# Altium PCB ECARD.PcbDoc (part 1 of 2)
Units mm, origin at the board's own origin, x right, y up, seen from the top; angles counter-clockwise.
Board outline 85.5 x 54 mm, 2 copper layers (Top Layer, Bottom Layer); 58 components, 66 nets, 238 pads, 223 vias.
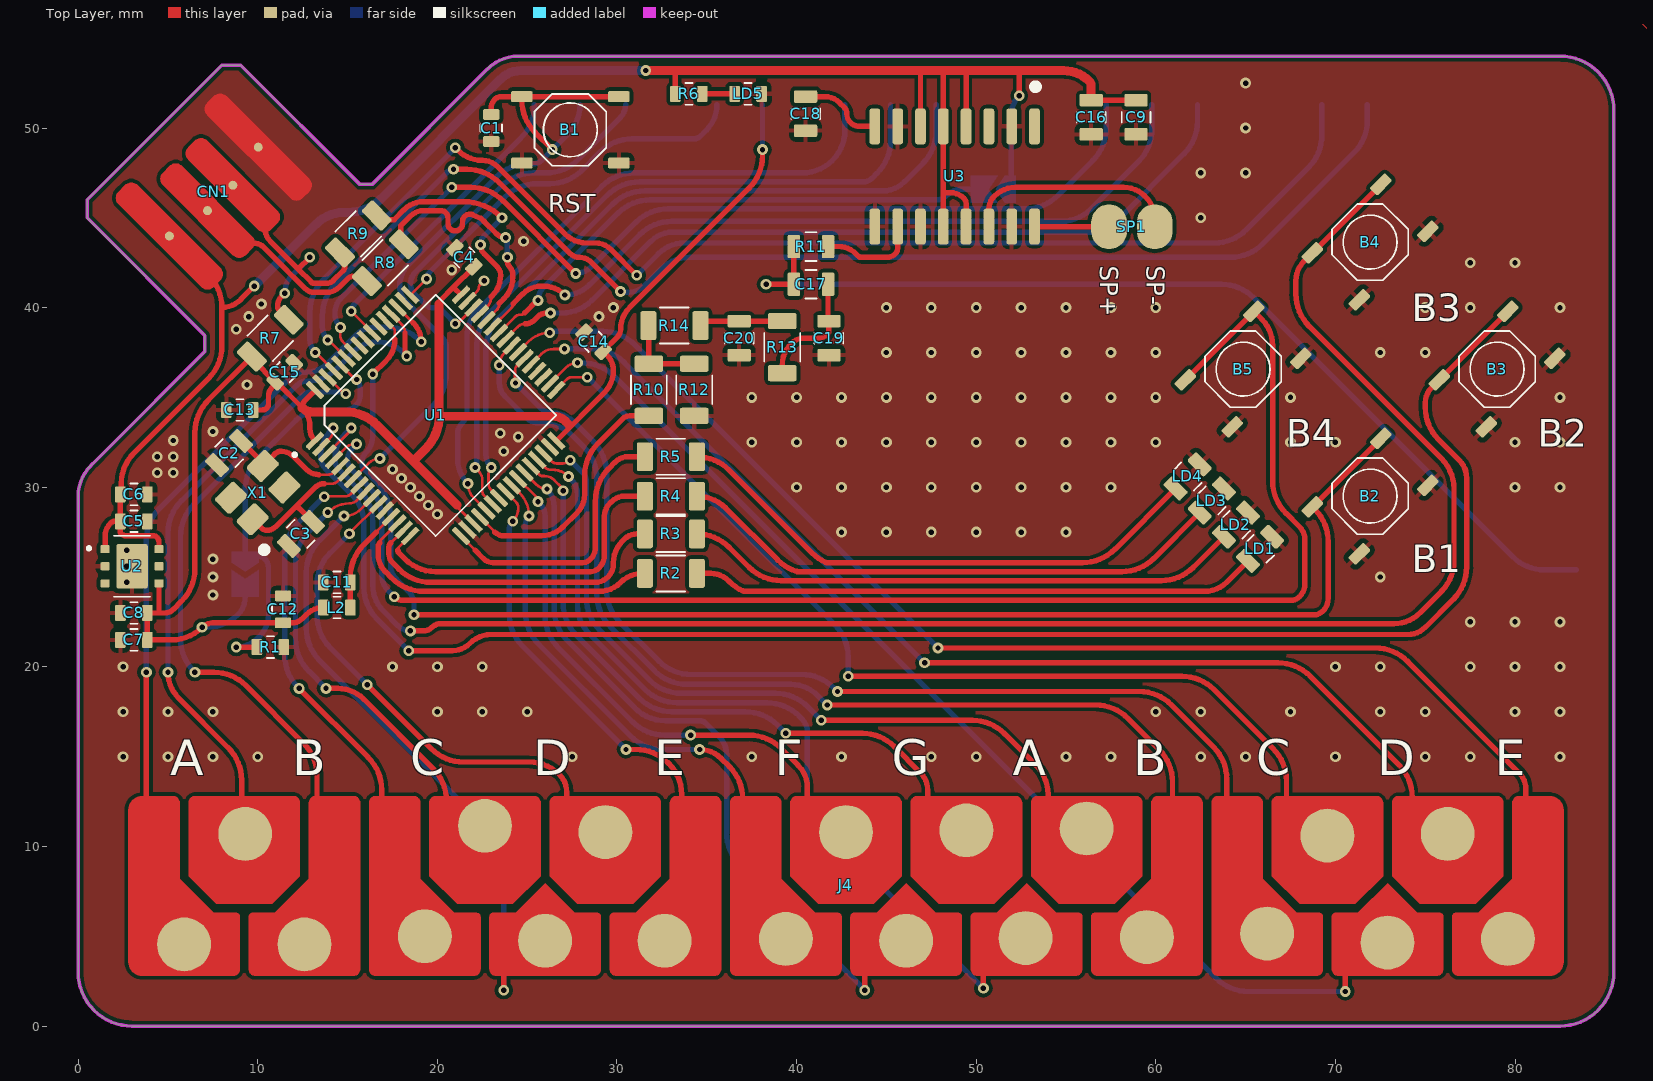
[diagram p0: Top Layer view]
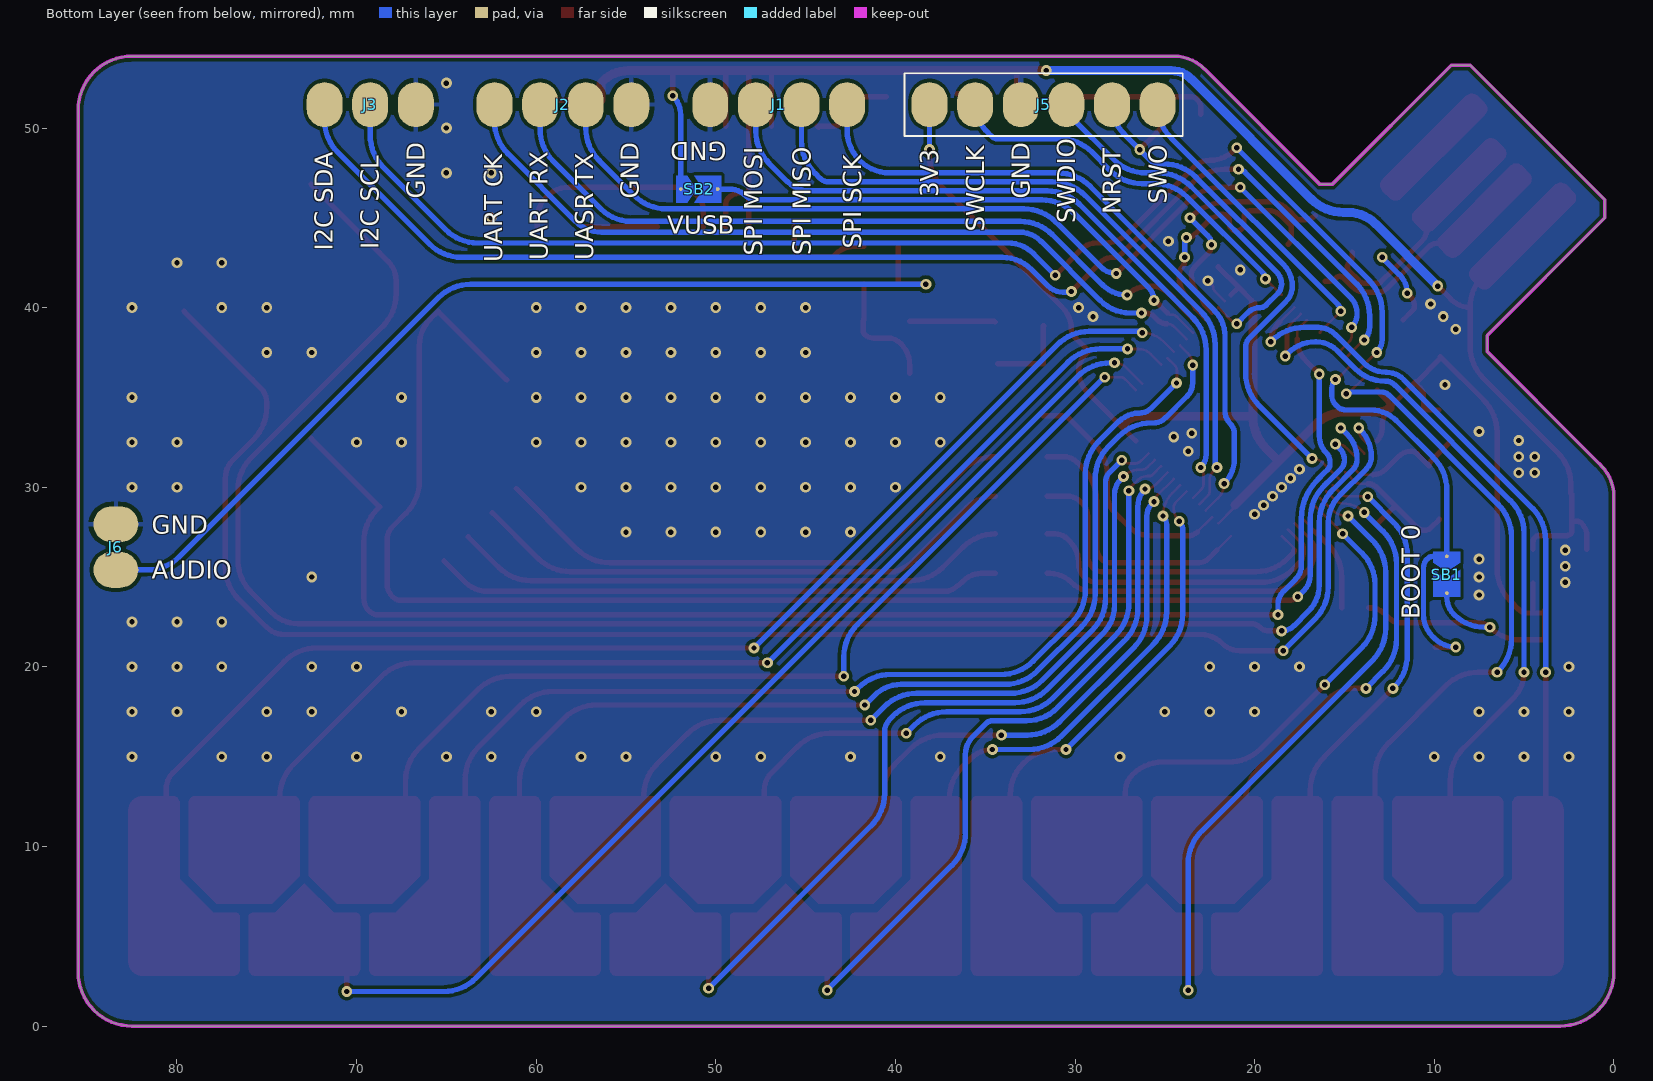
[diagram p1: Bottom Layer view, seen from below]
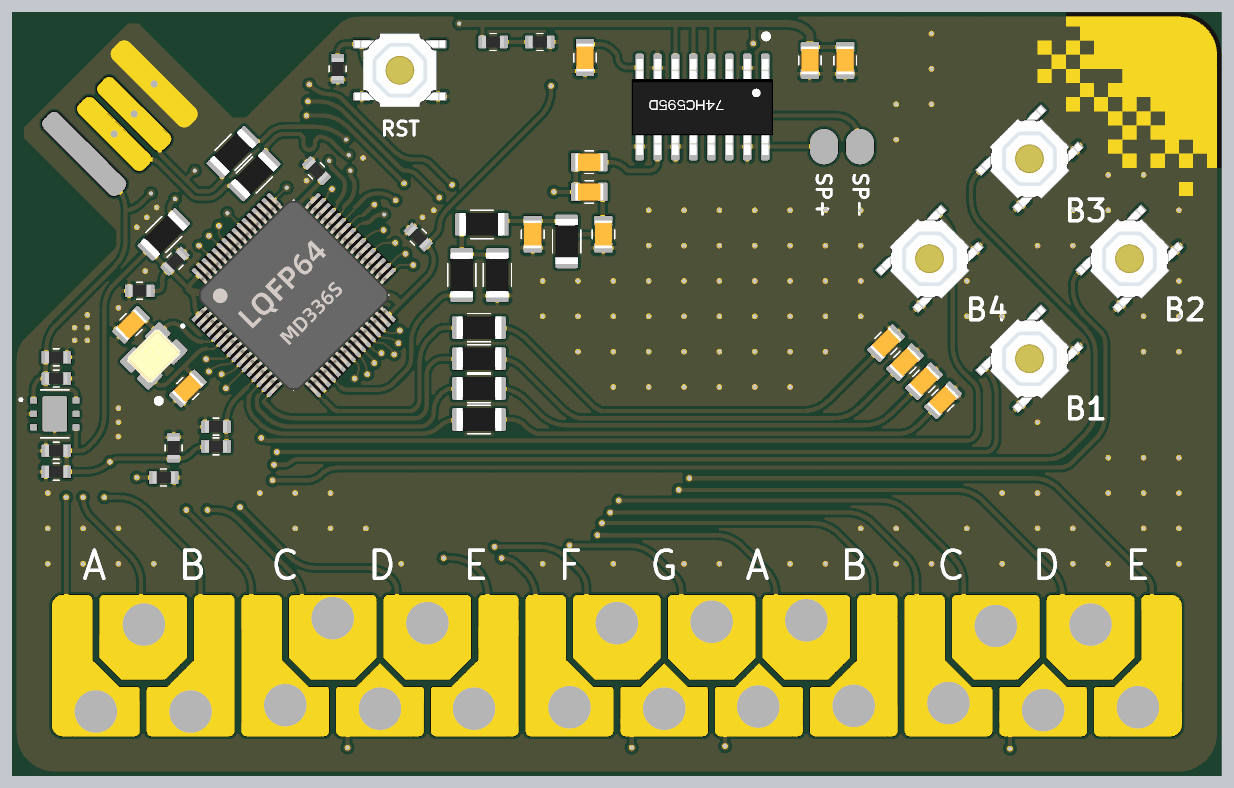
[diagram p3: 3D render of the assembled board from above, using the file's embedded part models]

## Layer stack, top to bottom
Top Solder: solder mask 0.0102, Solder Resist, Dk 3.5
Top Layer: signal copper 0.0356
Dielectric 1: dielectric 0.32, FR-4, Dk 4.8
Bottom Layer: signal copper 0.0356
Bottom Solder: solder mask 0.0102, Solder Resist, Dk 3.5

## Board outline
0,3 0,29.5 cw(c2.414,29.5) 0.707,31.207 7.056,37.556 7.056,38.444 0.5,45 0.5,46 8,53.5 9.045,53.5 15.688,46.858 16.358,46.858 22.793,53.293 cw(c24.5,51.586) 24.5,54 82.5,54 cw(c82.5,51) 85.5,51 85.5,3 cw(c82.5,3) 82.5,0 3,0 cw(c3,3)

## Design rules (kind name [scope] priority, off if disabled: settings)
AcuteAngle [All] p1: minimum=6.00000000000000E+0001 checktracksonly=FALSE
BoardOutlineClearance [All] p1: gap=0.2 ignorepadtopadclearanceinfootprint=FALSE
Clearance "Clearance-1 1 Oz" [All] p1: gap=0.2 ignorepadtopadclearanceinfootprint=FALSE except(0.25: Arc-Hole Track-Hole SMDPad-Hole THPad-Hole Via-Hole Fill-Hole Poly-Hole Region-Hole Text-Hole; 0.254: Track-Via Via-Via; 0.33: Track-THPad; 0.5: THPad-THPad) // Standart
DiffPairsRouting [All] p1: maxlimit=0.254 minlimit=0.16 mostfreqgap=0.2 toplayer_minwidth=0.16 toplayer_maxwidth=0.4 toplayer_prefwidth=0.3 bottomlayer_minwidth=0.16 bottomlayer_maxwidth=0.4 bottomlayer_prefwidth=0.3 maxuncoupledlength=12.7
HoleSize [All] p1: absolutevalues=TRUE maxlimit=5 minlimit=0.3 maxpercent=80.000 minpercent=20.000
MatchedLengths [InNetClass('DP')] p1: tolerance=0.5 checknetsindiffpair=TRUE checkdiffpairvsdiffpair=FALSE checkxsignals=FALSE checkothers=FALSE
MinimumAnnularRing [All] p1: minimumring=0.13
PlaneConnect [All] p1: pad.planeconnectstyle=Relief pad.reliefexpansion=0.508 pad.reliefentries=4 pad.reliefconductorwidth=0.254 pad.reliefairgap=0.254 via.planeconnectstyle=Direct via.reliefexpansion=0.508 via.reliefentries=4 via.reliefconductorwidth=0.254 via.reliefairgap=0.254
PolygonConnect [All] p1: thpad.connectstyle=Relief thpad.reliefconductorwidth=0.254 thpad.reliefentries=4 thpad.polygonreliefangle="90 Angle" thpad.airgapwidth=0.254 smdpad.connectstyle=Relief smdpad.reliefconductorwidth=0.254 smdpad.reliefentries=4 smdpad.polygonreliefangle="90 Angle" smdpad.airgapwidth=0.254 via.connectstyle=Direct via.reliefconductorwidth=0.254 via.reliefentries=4 via.polygonreliefangle="90 Angle" via.airgapwidth=0.254
RoutingVias [All] p1: holewidth=2 width=3 viastyle="Through Hole" minholewidth=0.3 minwidth=0.6 maxholewidth=0.5 maxwidth=0.8
SolderMaskExpansion [All] p1: expansion=-0.5 istentingtop=FALSE
Width [All] p1: maxlimit=0.5 minlimit=0.15 preferedwidth=0.3
27 further rules are at their usual default settings.

## Classes and differential pairs
component class Audio: C9 C16 C17 C18 C19 C20 J6 R10 R11 R12 R13 R14 SP1 U3
component class Connectors: CN1 J1 J2 J3 J4 J5 R7 R8 R9
component class Power: C5 C6 C7 C8 C11 C12 C13 C14 C15 L2 LD5 R6 U2
component class CPU: * B1 B2 B3 B4 B5 C1 C2 C3 C4 LD1 LD2 LD3 LD4 R1 R2 R3 R4 R5 SB1 SB2 U1 X1

## Components (designator, comment, footprint, x,y, rotation, side; value= is the part's Value field where it differs from the comment)
B1 "but" TS44-SMD 27.4,49.9 r0 top
B2 "but" TS44-SMD 71.931,29.504 r45 top
B3 "but" TS44-SMD 79.002,36.575 r45 top
B4 "but" TS44-SMD 71.931,43.646 r45 top
B5 "but" TS44-SMD 64.86,36.575 r45 top
C1 "100 nF" 0603 23,50 r90 top
C2 "100 pF" 0805 8.4,31.9 r45 top
C3 "100 pF" 0805 12.4,27.4 r45 top
C4 "1 uF" 0603 21.5,42.8 r315 top
C5 "1 uF" 0603 3.1,28.1 r0 top
C6 "100 nF" 0603 3.1,29.6 r0 top
C7 "1 uF" 0603 3.1,21.5 r180 top
C8 "100 nF" 0603 3.1,23 r180 top
C9 "100 pF" 0805 58.9,50.6 r90 top
C11 "100 nF" 0603 14.4,24.7 r0 top
C12 "100 nF" 0603 11.4,23.2 r270 top
C13 "100 nF" 0603 9,34.3 r0 top
C14 "100 nF" 0603 28.7,38.1 r315 top
C15 "100 nF" 0603 11.5,36.4 r225 top
C16 "100 pF" 0805 56.4,50.6 r90 top
C17 "100 pF" 0805 40.8,41.3 r0 top
C18 "100 pF" 0805 40.5,50.8 r90 top
C19 "100 pF" 0805 41.8,38.3 r90 top
C20 "100 pF" 0805 36.8,38.3 r90 top
CN1 "USB" USB 7.907,46.107 r45 top
J1 "4x2.54" "SMD 4x2.54" 46.5,51.3 r0 bottom
J2 "4x2.54" "SMD 4x2.54" 58.51,51.3 r180 bottom
J3 "3x2.54" "SMD 3x2.54" 69.24,51.3 r180 bottom
J4 "piano_full" PIANO_FULL 2.8,2.8 r0 top
J5 "SWD" SWD_6_2.54 31.75,51.3 r180 bottom
J6 "2x2.54" "SMD 2x2.54" 83.4,26.67 r270 bottom
L2 "100 mH" 0603 14.4,23.3 r0 top
LD1 "LED" 0805 65.804,26.572 r45 top
LD2 "LED" 0805 64.461,27.915 r45 top
LD3 "LED" 0805 63.117,29.259 r45 top
LD4 "LED" 0805 61.774,30.602 r45 top
LD5 "LED" 0603 37.3,51.9 r0 top
R1 "10 кOm" 0603 10.7,21.1 r180 top
R2 "100 Om" 1206 33,25.2 r0 top
R3 "100 Om" 1206 33,27.4 r0 top
R4 "100 Om" 1206 33,29.5 r0 top
R5 "100 Om" 1206 33,31.7 r0 top
R6 "1 kOm" 0603 34,51.9 r180 top
R7 "1.5 kOm" 1206 10.7,38.3 r225 top
R8 "22 Om" 1206 17.1,42.5 r45 top
R9 "22 Om" 1206 15.6,44.1 r45 top
R10 "100 Om" 1206 31.775,35.425 r270 top
R11 "100 Om" 0805 40.8,43.4 r180 top
R12 "100 Om" 1206 34.3,35.425 r90 top
R13 "100 Om" 1206 39.2,37.8 r90 top
R14 "100 Om" 1206 33.2,39 r180 top
SB1 "Jumper" SB 9.3,25.9 r0 bottom
SB2 "Jumper" SB 51.7,46.6 r270 bottom
SP1 "speaker" "SMD 2x2.54" 58.67,44.5 r180 top
U1 "STM32L476" "LQFP - 64" 19.9,34 r315 top
U2 "LD39050" DFN6 3,25.6 r270 top
U3 "pam8403" sop16 48.8,47.3 r180 top
X1 "24.000" CSX-3225 10,29.7 r45 top

## Footprints (in the part's own frame and the unit in brackets; to place one, negate y for a bottom-side part, rotate by r counter-clockwise, add the part's x,y. Pads: shape width x height; smd on the part's side, far side on the other; paste and mask are expansions set on the pad)
0603 [mm]
  rrect25% 0.6x0.9 smd mask+0.05: 1(-0.75,0) 2(0.75,0)
  silkscreen extent -0.2,-0.6 0.2,0.6, body extent -0.8,-0.4 0.8,0.4, height 0.45
0805 [mm]
  rrect25% 0.7x1.3 smd mask+0.05: 1(-0.95,0) 2(0.95,0)
  silkscreen extent -0.3,-0.8 0.3,0.8, body extent -1,-0.62 1,0.62, height 1.35
1206 [mm]
  rrect25% 0.9x1.6 smd mask+0.05: 1(-1.45,0) 2(1.45,0)
  silkscreen extent -0.8,-1 0.8,1, body extent -1.6,-0.8 1.6,0.8, height 0.61
CSX-3225 [mm]
  rrect25% 1.5x1.2 smd mask+0.05: 1(-1.25,-0.85) 2(1.25,-0.85) 3(1.25,0.85) 4(-1.25,0.85)
  silkscreen extent -2.1,-2.6 -1.9,-2.4, body extent -1.6,-1.25 1.6,1.25, height 0.65
DFN6 [mm]
  rrect15% 2.5x1.75 smd mask+0.05: 0(0,0)
  rrect25% 0.45x0.5 smd mask+0.05: 1(-0.95,-1.5) 2(0,-1.5) 3(0.95,-1.5) 4(0.95,1.5) 5(0,1.5) 6(-0.95,1.5)
  silkscreen extent -1.7,-2.45 1.7,1, body extent -1.5,-1.5 1.5,1.5, height 0.8
"LQFP - 64" [mm]
  rrect30% 0.3x1.2 smd mask-0.5: 1(-3.75,-5.75) 2(-3.25,-5.75) 3(-2.75,-5.75) 4(-2.25,-5.75) 5(-1.75,-5.75) 6(-1.25,-5.75) 7(-0.75,-5.75) 8(-0.25,-5.75) 9(0.25,-5.75) 10(0.75,-5.75) 11(1.25,-5.75) 12(1.75,-5.75) 13(2.25,-5.75) 14(2.75,-5.75) 15(3.25,-5.75) 16(3.75,-5.75) 33(3.75,5.75) 34(3.25,5.75) 35(2.75,5.75) 36(2.25,5.75) 37(1.75,5.75) 38(1.25,5.75) 39(0.75,5.75) 40(0.25,5.75) 41(-0.25,5.75) 42(-0.75,5.75) 43(-1.25,5.75) 44(-1.75,5.75) 45(-2.25,5.75) 46(-2.75,5.75) 47(-3.25,5.75) 48(-3.75,5.75)
  rrect30% 1.2x0.3 smd mask-0.5: 17(5.75,-3.75) 18(5.75,-3.25) 19(5.75,-2.75) 20(5.75,-2.25) 21(5.75,-1.75) 22(5.75,-1.25) 23(5.75,-0.75) 24(5.75,-0.25) 25(5.75,0.25) 26(5.75,0.75) 27(5.75,1.25) 28(5.75,1.75) 29(5.75,2.25) 30(5.75,2.75) 31(5.75,3.25) 32(5.75,3.75) 49(-5.75,3.75) 50(-5.75,3.25) 51(-5.75,2.75) 52(-5.75,2.25) 53(-5.75,1.75) 54(-5.75,1.25) 55(-5.75,0.75) 56(-5.75,0.25) 57(-5.75,-0.25) 58(-5.75,-0.75) 59(-5.75,-1.25) 60(-5.75,-1.75) 61(-5.75,-2.25) 62(-5.75,-2.75) 63(-5.75,-3.25) 64(-5.75,-3.75)
  silkscreen extent -4.75,-7.16 4.75,4.75, body extent -6,-6.03 6.02,5.99, height 1.6
PIANO_FULL [mm]
  round 3 smd mask+0.05: 1(3.1,1.75) 2(6.5,7.9) 3(9.8,1.75) 4(16.5,2.2) 5(19.85,8.35) 6(23.2,1.95) 7(26.55,8) 8(29.85,1.95) 9(36.6,2.05) 10(39.95,8) 11(43.3,1.95) 12(46.65,8.1) 13(49.95,2.1) 14(53.35,8.2) 15(56.7,2.15) 16(63.4,2.35) 17(66.75,7.8) 18(70.1,1.85) 19(73.45,7.9) 20(76.8,2.05)
  Top Layer region: 67,0.35 67,3.3 67.027,3.4 67.1,3.473 67.2,3.5 67.2,3.5 68.45,3.5 70.1,5.15 71.75,3.5 73,3.5 73.077,3.485 73.141,3.441 73.185,3.377 73.2,3.3 73.2,3.3 73.2,0.35 73.173,0.216 73.097,0.103 72.984,0.027 72.85,0 72.85,0 67.35,0 67.216,0.027 67.103,0.103 67.027,0.216 67,0.35
  Top Layer region: 46.9,0.35 46.9,3.3 46.927,3.4 47,3.473 47.1,3.5 47.1,3.5 48.35,3.5 50,5.15 51.65,3.5 52.9,3.5 52.977,3.485 53.041,3.441 53.085,3.377 53.1,3.3 53.1,3.3 53.1,0.35 53.073,0.216 52.997,0.103 52.884,0.027 52.75,0 52.75,0 47.25,0 47.116,0.027 47.003,0.103 46.927,0.216 46.9,0.35
  Top Layer region: 40.2,0.35 40.2,3.3 40.227,3.4 40.3,3.473 40.4,3.5 40.4,3.5 41.65,3.5 43.3,5.15 44.95,3.5 46.2,3.5 46.277,3.485 46.341,3.441 46.385,3.377 46.4,3.3 46.4,3.3 46.4,0.35 46.373,0.216 46.297,0.103 46.184,0.027 46.05,0 46.05,0 40.55,0 40.416,0.027 40.303,0.103 40.227,0.216 40.2,0.35
  Top Layer region: 20.1,0.35 20.1,3.3 20.127,3.4 20.2,3.473 20.3,3.5 20.3,3.5 21.55,3.5 23.2,5.15 24.85,3.5 26.1,3.5 26.177,3.485 26.241,3.441 26.285,3.377 26.3,3.3 26.3,3.3 26.3,0.35 26.273,0.216 26.197,0.103 26.084,0.027 25.95,0 25.95,0 20.45,0 20.316,0.027 20.203,0.103 20.127,0.216 20.1,0.35
  Top Layer region: 73.7,0.35 73.7,3.3 73.727,3.4 73.8,3.473 73.9,3.5 73.9,3.5 75.15,3.5 77.05,5.4 77.05,9.65 77.077,9.784 77.153,9.897 77.266,9.973 77.4,10 77.4,10 79.152,10 79.15,10 79.437,9.943 79.68,9.78 79.843,9.537 79.9,9.25 79.9,9.25 79.9,9.252 79.9,0.748 79.9,0.75 79.843,0.463 79.68,0.22 79.437,0.057 79.15,0 79.15,0 74.05,0 73.916,0.027 73.803,0.103 73.727,0.216 73.7,0.35
  Top Layer region: 70.35,5.55 70.35,9.65 70.377,9.784 70.453,9.897 70.566,9.973 70.7,10 70.7,10 76.2,10 76.334,9.973 76.447,9.897 76.523,9.784 76.55,9.65 76.55,9.65 76.55,5.55 75,4 71.9,4
  Top Layer region: 63.65,5.55 63.65,9.65 63.677,9.784 63.753,9.897 63.866,9.973 64,10 64,10 69.5,10 69.634,9.973 69.747,9.897 69.823,9.784 69.85,9.65 69.85,9.65 69.85,5.55 68.3,4 65.2,4
  Top Layer region: 60.3,0.35 60.3,9.65 60.327,9.784 60.403,9.897 60.516,9.973 60.65,10 60.65,10 62.8,10 62.934,9.973 63.047,9.897 63.123,9.784 63.15,9.65 63.15,9.65 63.15,5.4 65.05,3.5 66.3,3.5 66.377,3.485 66.441,3.441 66.485,3.377 66.5,3.3 66.5,3.3 66.5,0.35 66.473,0.216 66.397,0.103 66.284,0.027 66.15,0 66.15,0 60.65,0 60.516,0.027 60.403,0.103 60.327,0.216 60.3,0.35
  Top Layer region: 53.6,0.35 53.6,3.3 53.627,3.4 53.7,3.473 53.8,3.5 53.8,3.5 55.05,3.5 56.95,5.4 56.95,9.65 56.977,9.784 57.053,9.897 57.166,9.973 57.3,10 57.3,10 59.45,10 59.584,9.973 59.697,9.897 59.773,9.784 59.8,9.65 59.8,9.65 59.8,0.35 59.773,0.216 59.697,0.103 59.584,0.027 59.45,0 59.45,0 53.95,0 53.816,0.027 53.703,0.103 53.627,0.216 53.6,0.35
  Top Layer region: 50.25,5.55 50.25,9.65 50.277,9.784 50.353,9.897 50.466,9.973 50.6,10 50.6,10 56.1,10 56.234,9.973 56.347,9.897 56.423,9.784 56.45,9.65 56.45,9.65 56.45,5.55 54.9,4 51.8,4
  Top Layer region: 43.55,5.55 43.55,9.65 43.577,9.784 43.653,9.897 43.766,9.973 43.9,10 43.9,10 49.4,10 49.534,9.973 49.647,9.897 49.723,9.784 49.75,9.65 49.75,9.65 49.75,5.55 48.2,4 45.1,4
  Top Layer region: 36.85,5.55 36.85,9.65 36.877,9.784 36.953,9.897 37.066,9.973 37.2,10 37.2,10 42.7,10 42.834,9.973 42.947,9.897 43.023,9.784 43.05,9.65 43.05,9.65 43.05,5.55 41.5,4 38.4,4
  Top Layer region: 33.5,0.35 33.5,9.65 33.527,9.784 33.603,9.897 33.716,9.973 33.85,10 33.85,10 36,10 36.134,9.973 36.247,9.897 36.323,9.784 36.35,9.65 36.35,9.65 36.35,5.4 38.25,3.5 39.5,3.5 39.577,3.485 39.641,3.441 39.685,3.377 39.7,3.3 39.7,3.3 39.7,0.35 39.673,0.216 39.597,0.103 39.484,0.027 39.35,0 39.35,0 33.85,0 33.716,0.027 33.603,0.103 33.527,0.216 33.5,0.35
  Top Layer region: 26.8,0.35 26.8,3.3 26.827,3.4 26.9,3.473 27,3.5 27,3.5 28.25,3.5 30.15,5.4 30.15,9.65 30.177,9.784 30.253,9.897 30.366,9.973 30.5,10 30.5,10 32.65,10 32.784,9.973 32.897,9.897 32.973,9.784 33,9.65 33,9.65 33,0.35 32.973,0.216 32.897,0.103 32.784,0.027 32.65,0 32.65,0 27.15,0 27.016,0.027 26.903,0.103 26.827,0.216 26.8,0.35
  Top Layer region: 23.45,5.55 23.45,9.65 23.477,9.784 23.553,9.897 23.666,9.973 23.8,10 23.8,10 29.3,10 29.434,9.973 29.547,9.897 29.623,9.784 29.65,9.65 29.65,9.65 29.65,5.55 28.1,4 25,4
  Top Layer region: 16.75,5.55 16.75,9.65 16.777,9.784 16.853,9.897 16.966,9.973 17.1,10 17.1,10 22.6,10 22.734,9.973 22.847,9.897 22.923,9.784 22.95,9.65 22.95,9.65 22.95,5.55 21.4,4 18.3,4
  Top Layer region: 13.401,0.325 13.401,9.651 13.4,9.65 13.427,9.784 13.503,9.897 13.616,9.973 13.75,10 13.75,10 13.746,9.996 15.904,9.996 15.9,10 16.034,9.973 16.147,9.897 16.223,9.784 16.25,9.65 16.25,9.65 16.251,9.649 16.251,5.396 18.151,3.496 19.404,3.496 19.48,3.481 19.543,3.438 19.586,3.374 19.601,3.299 19.601,3.299 19.601,0.351 19.6,0.35 19.573,0.216 19.497,0.103 19.384,0.027 19.25,0 19.25,0 19.246,-0.004 13.73,-0.004 13.75,0 13.616,0.027 13.503,0.103 13.427,0.216 13.4,0.35
  Top Layer region: 6.7,0.35 6.7,3.3 6.727,3.4 6.8,3.473 6.9,3.5 6.9,3.5 8.15,3.5 10.05,5.4 10.05,9.65 10.077,9.784 10.153,9.897 10.266,9.973 10.4,10 10.4,10 12.55,10 12.684,9.973 12.797,9.897 12.873,9.784 12.9,9.65 12.9,9.65 12.9,0.35 12.873,0.216 12.797,0.103 12.684,0.027 12.55,0 12.55,0 7.05,0 6.916,0.027 6.803,0.103 6.727,0.216 6.7,0.35
  Top Layer region: 3.35,5.55 3.35,9.65 3.377,9.784 3.453,9.897 3.566,9.973 3.7,10 3.7,10 9.2,10 9.334,9.973 9.447,9.897 9.523,9.784 9.55,9.65 9.55,9.65 9.55,5.55 8,4 4.9,4
  Top Layer region: 0,0.75 0,9.25 0.057,9.537 0.22,9.78 0.463,9.943 0.75,10 0.75,10 2.5,10 2.634,9.973 2.747,9.897 2.823,9.784 2.85,9.65 2.85,9.65 2.85,5.4 4.75,3.5 6,3.5 6.077,3.485 6.141,3.441 6.185,3.377 6.2,3.3 6.2,3.3 6.2,0.35 6.173,0.216 6.097,0.103 5.984,0.027 5.85,0 5.85,0 0.75,0 0.463,0.057 0.22,0.22 0.057,0.463 0,0.75
SB [mm]
  round 0.2 smd mask+0.05: 1(0,-0.25) 2(0,1.8)
  Top Layer region: -0.75,-0.5 0.75,-0.5 0.75,0.1 0,0.6 -0.75,0.1
  Top Layer region: -0.75,0.5 0,1 0.75,0.5 0.75,2 -0.75,2
"SMD 2x2.54" [mm]
  oval 2x2.5 smd mask+0.05: 1(-1.27,0) 2(1.27,0)
"SMD 3x2.54" [mm]
  oval 2x2.5 smd mask+0.05: 1(-2.54,0) 2(0,0) 3(2.54,0)
"SMD 4x2.54" [mm]
  oval 2x2.5 smd mask+0.05: 1(-3.81,0) 2(-1.27,0) 3(1.27,0) 4(3.81,0)
sop16 [mm]
  rrect50% 0.6x2 smd mask+0.05: 1(-4.445,-2.79) 2(-3.175,-2.79) 3(-1.905,-2.79) 4(-0.635,-2.79) 5(0.635,-2.79) 6(1.905,-2.79) 7(3.175,-2.79) 8(4.445,-2.79) 9(4.445,2.79) 10(3.175,2.79) 11(1.905,2.79) 12(0.635,2.79) 13(-0.635,2.79) 14(-1.905,2.79) 15(-3.175,2.79) 16(-4.445,2.79)
  silkscreen extent -4.6,-5.1 -4.4,-4.9, body extent -5,-3.4 5,3.4, height 1.7
SWD_6_2.54 [mm]
  oval 2x2.5 smd mask+0.05: 1(-6.35,0) 2(-3.81,0) 3(-1.27,0) 4(1.27,0) 5(3.81,0) 6(6.35,0)
  silkscreen extent -7.75,-1.75 7.75,1.75
TS44-SMD [mm]
  rrect25% 1.2x0.6 smd mask+0.05: 1(-2.7,1.85) 2(2.7,1.85) 3(-2.7,-1.85) 4(2.7,-1.85)
  silkscreen extent -2,-2 2,2, body extent -3.2,-2.6 3.2,2.6, height 2
USB [mm]
  round 0.5 smd mask+0.05: 1(-3.5,0.5) 2(-1,0) 3(1,0) 4(3.5,0.5)
  Top Layer region: 2.75,-2.75 2.75,3.75 2.788,3.941 2.896,4.104 3.059,4.212 3.25,4.25 3.25,4.25 3.75,4.25 3.941,4.212 4.104,4.104 4.212,3.941 4.25,3.75 4.25,3.75 4.25,-2.75 4.212,-2.941 4.104,-3.104 3.941,-3.212 3.75,-3.25 3.75,-3.25 3.25,-3.25 3.059,-3.212 2.896,-3.104 2.788,-2.941 2.75,-2.75
  Top Layer region: -1.75,-2.75 -1.75,2.75 -1.712,2.941 -1.604,3.104 -1.441,3.212 -1.25,3.25 -1.25,3.25 -0.75,3.25 -0.559,3.212 -0.396,3.104 -0.288,2.941 -0.25,2.75 -0.25,2.75 -0.25,-2.75 -0.288,-2.941 -0.396,-3.104 -0.559,-3.212 -0.75,-3.25 -0.75,-3.25 -1.25,-3.25 -1.441,-3.212 -1.604,-3.104 -1.712,-2.941 -1.75,-2.75
  Top Layer region: 0.25,-2.75 0.25,2.75 0.288,2.941 0.396,3.104 0.559,3.212 0.75,3.25 0.75,3.25 1.25,3.25 1.441,3.212 1.604,3.104 1.712,2.941 1.75,2.75 1.75,2.75 1.75,-2.75 1.712,-2.941 1.604,-3.104 1.441,-3.212 1.25,-3.25 1.25,-3.25 0.75,-3.25 0.559,-3.212 0.396,-3.104 0.288,-2.941 0.25,-2.75
  Top Layer region: -4.25,-2.75 -4.25,3.75 -4.212,3.941 -4.104,4.104 -3.941,4.212 -3.75,4.25 -3.75,4.25 -3.25,4.25 -3.059,4.212 -2.896,4.104 -2.788,3.941 -2.75,3.75 -2.75,3.75 -2.75,-2.75 -2.788,-2.941 -2.896,-3.104 -3.059,-3.212 -3.25,-3.25 -3.25,-3.25 -3.75,-3.25 -3.941,-3.212 -4.104,-3.104 -4.212,-2.941 -4.25,-2.75

## Part data
C1 C2 C3 C4 C5 C6 C7 C8 C9 C11 C12 C13 C14 C15 C16 C17 C18 C19 C20: library part Cup
CN1: library part USB_2
L2: library part Inductor
R1 R2 R3 R4 R5 R6 R7 R8 R9 R10 R11 R12 R13 R14: library part Res
U1: library part STM32L476RG, "The ultra-low-power microcontrollers based on the highperformance Arm Cortex-M4 32-bit RISC core operating at a frequency of up to 80 MHz."
U2: "voltage regulator"
X1: library part CSX-3225, "Crystal Resonator"

## Via types
v1: diameter 0.6, hole 0.3, Top Layer to Bottom Layer, 223 vias

## Nets (pads, with @x,y where several pads share a name; then routed paths per layer and width w, separated by ;. In a path a pad name is that pad's centre, name@x,y a point inside that pad or via, vN(x,y) a via of type N, cw(c..) or ccw(c..) an arc to the next point about the centre after c; other vN are vias at no path point)
"3.3 V": C4.2 C7.1 C8.1 C12.2 C13.2 C14.2 C15.2 J5.1 L2.1 R7.2 SB1.2 U1.1 U1.19 U1.32 U1.48 U1.64 U2.4 | length 99.6
  Top Layer w0.15: 21.1,29 ccw(c21.315,29) 21.163,28.848 U1.19@22.021,27.99
  Top Layer w0.3: C8.1@3.85,23.155 C8.1@3.85,23 ; U2.4@4.5,24.65 4.5,23 ; R7.2@9.675,37.275 7.244,34.844 ccw(c9.04,33.048) 6.5,33.048 6.5,25.452 cw(c3.96,25.452) 5.756,23.656 5.3,23.2 cw(c4.817,23.683) 4.817,23 4.5,23 ; C13.2@9.75,34.3 10.259,34.3 ccw(c10.259,34.641) 10.5,34.4 ccw(c10.259,34.641) 10.6,34.641 10.6,35.1 cw(c11.212,35.1) 10.779,35.533 C15.2@11.043,35.796 ; R7.2@9.753,37.087 C15.2@10.97,35.87 cw(c10.97,35.723) 11.073,35.827 12.476,34.424 cw(c13.083,34.424) 12.654,34.854 13.16,35.36 ccw(c13.106,35.414) U1.64@13.182,35.414 ; 12.477,34.423 cw(c11.451,33.4) 12.9,33.4 12.9,33.268 ccw(c13.864,33.268) U1.1@13.182,32.586 ; L2.1@13.529,23.25 ccw(c13.529,23.421) L2.1@13.65,23.3 ccw(c13.65,21.972) 12.711,22.911 12.5,22.7 cw(c11.896,23.304) 11.896,22.45 C12.2@11.4,22.45 7.504,22.45 ccw(c7.504,21.596) v1(6.9,22.2) cw(c5.21,23.89) 5.21,21.5 C7.1@3.85,21.5 C8.1@3.85,23 ; 20.1,40.2 cw(c20.436,40.2) 20.199,40.438 20.88,41.12 ; U1.48@21.314,40.718 20.935,41.097 ccw(c20.88,41.043) 20.88,41.12 ; C4.2@22.03,42.27 20.88,41.12 ; U1.32@26.618,32.586 29.283,35.251 ccw(c28.033,36.5) 29.8,36.5 ccw(c28.593,36.5) 29.446,37.354 C14.2@29.23,37.57 30.016,38.355 ccw(c29.571,38.8) 30.2,38.8 cw(c31.89,38.8) 30.695,39.995 37.356,46.656 ccw(c35.56,48.452) 38.1,48.452 v1(38.1,48.8) ; C8.1@3.85,23 4.5,23
  Top Layer w0.5: 12.477,34.423 ccw(c13.017,34.966) 13.017,34.2 14.848,34.2 cw(c14.848,31.66) 16.644,33.456 18.65,31.45 ; 20.1,40.2 20.1,33.952 ; 21.1,29 18.65,31.45 ; 27.3,33.5 27.124,33.676 ccw(c26.458,33.01) 26.458,33.952 20.1,33.952 ; 18.65,31.45 19.356,32.156 ccw(c17.56,33.952) 20.1,33.952
  Bottom Layer w0.3: v1(6.9,22.2) 7.186,22.2 ccw(c7.186,24.614) 8.893,22.907 ccw(c7.91,23.89) 9.3,23.89 SB1.2@9.3,24.1 ; v1(38.1,48.8) J5.1@38.1,51.3
"5 V": C5.1 C6.1 C9.2 C16.2 CN1.1 R6.2 SB2.1 U2.1 U2.6 U3.4 U3.5 U3.6 U3.12 U3.13 | length 107.7
  Top Layer w0.3: U2.1@1.5,26.55 1.5,27.276 cw(c2.524,27.276) 1.8,28 cw(c2.041,27.759) 2.041,28.1 C5.1@2.35,28.1 ; U2.6@4.5,26.55 4.5,26.959 ccw(c4.159,26.959) 4.4,27.2 ccw(c4.159,26.959) 4.159,27.3 2.641,27.3 cw(c2.641,27.641) 2.4,27.4 cw(c2.521,27.521) 2.35,27.521 C5.1@2.35,28.1 ; CN1.1@5.079,43.986 7.256,41.808 cw(c5.46,40.012) 8,40.012 ; v1(9.8,41.2) 9.045,40.445 cw(c8,41.491) 8,40.012 ; 33.2,53.2 cw(c33.079,53.079) 33.25,53.079 R6.2@33.25,51.9 ; 46.8,53.2 cw(c46.571,52.971) 46.895,52.971 U3.6@46.895,50.09 ; U3.12@48.165,44.51 48.165,46.4 ; 48.2,53.2 ccw(c48.285,53.115) 48.165,53.115 U3.5@48.165,50.09 48.165,46.4 ; U3.13@49.435,44.51 49.435,45.774 ccw(c48.974,45.774) 49.3,46.1 ccw(c48.576,45.376) 48.576,46.4 48.165,46.4 ; U3.4@49.435,50.09 49.435,53.043 cw(c49.657,53.043) 49.5,53.2 ; v1(52.4,51.8) 52.4,53.2 ; C16.2@56.4,51.55 C9.2@58.9,51.55 ; C5.1@2.35,28.1 C6.1@2.35,29.6 ccw(c2.229,29.721) 2.4,29.721 2.4,30.2 cw(c4.814,30.2) 3.107,31.907 7.256,36.056 ccw(c5.46,37.852) 8,37.852 8,40.012
  Top Layer w0.5: v1(31.6,53.2) 33.2,53.2 46.8,53.2 48.2,53.2 49.5,53.2 52.4,53.2 54.851,53.2 cw(c54.851,51.151) 56.3,52.6 cw(c56.059,52.359) 56.4,52.359 C16.2@56.4,51.55
  Bottom Layer w0.3: SB2.1@51.95,46.6 51.95,50.714 cw(c53.486,50.714) v1(52.4,51.8)
  Bottom Layer w0.5: v1(9.8,41.2) 13.264,44.664 cw(c14.8,43.127) 14.8,45.3 15.048,45.3 ccw(c15.048,47.84) 16.844,46.044 23.539,52.739 cw(c24.652,51.626) 24.652,53.2 v1(31.6,53.2)
AVDD: C11.2 L2.2 U1.13 | length 5.9
  Top Layer w0.15: 16.6,27.5 cw(c16.643,27.5) 16.613,27.531 U1.13@17.425,28.343
  Top Layer w0.3: L2.2@15.15,23.3 C11.2@15.15,24.7 15.15,24.998 cw(c17.69,24.998) 15.894,26.794 16.6,27.5
BUT1: B2.1 B2.2 U1.53 | length 80.4
  Top Layer w0.15: U1.53@17.072,39.303 cw(c17.072,39.243) 17.114,39.286 17.6,38.8 ; 17.6,38.8 cw(c17.517,38.717) 17.634,38.717 17.634,38.234
  Top Layer w0.3: v1(16.4,36.3) 17.139,37.039 ccw(c15.944,38.234) 17.634,38.234 ; v1(18.7,22.9) 21.1,22.9 68.817,22.9 ccw(c68.817,23.583) 69.3,23.1 ccw(c68.576,23.824) 69.6,23.824 69.6,26.965 ccw(c67.06,26.965) 68.856,28.761 B2.1@68.714,28.903 B2.2@72.532,32.721
  Bottom Layer w0.3: v1(16.4,36.3) 16.4,32.866 cw(c15.034,32.866) 16,31.9 ccw(c16.483,31.417) 15.8,31.417 15.8,31.3 ccw(c16.231,31.3) 15.926,30.995 16.111,30.811 16.356,30.566 cw(c13.851,28.051) 16.546,30.36 cw(c14.36,28.248) 17.4,28.248 17.4,25.624 ccw(c18.424,25.624) 17.7,24.9 18.4,24.2 cw(c17.676,23.476) 18.7,23.476 v1(18.7,22.9)
BUT2: B3.1 B3.2 U1.2 | length 93.7
  Top Layer w0.15: U1.2@13.536,32.232 13.536,32.236 14,32.7 ccw(c13.517,33.183) 14.2,33.183 v1(14.2,33.3)
  Top Layer w0.3: v1(18.4,20.9) 20.834,20.9 ccw(c20.834,22.266) 21.8,21.3 cw(c23.007,20.093) 23.007,21.8 23.2,21.8 74.034,21.8 ccw(c74.034,23.166) 75,22.2 76.556,23.756 ccw(c74.76,25.552) 77.3,25.552 77.3,30.534 ccw(c75.934,30.534) 76.9,31.5 75.744,32.656 cw(c77.54,34.452) 75,34.452 75,34.7 cw(c76.18,34.7) 75.346,35.535 B3.1@75.785,35.974 B3.2@79.603,39.792
  Bottom Layer w0.3: v1(14.2,33.3) 14.136,33.236 ccw(c15.673,31.7) 13.5,31.7 ccw(c14.466,31.7) 13.783,31.017 15.3,29.5 cw(c13.851,28.051) 15.9,28.051 15.9,24.452 ccw(c18.44,24.452) 16.644,22.656 v1(18.4,20.9)
BUT3: B4.1 B4.2 U1.3 | length 101.6
  Top Layer w0.15: U1.3@13.89,31.879 15.122,33.111 ccw(c14.932,33.3) v1(15.2,33.3)
  Top Layer w0.3: v1(18.5,22) 19.217,22 ccw(c19.217,22.683) 19.7,22.2 cw(c20.183,21.717) 20.183,22.4 20.9,22.4 73.251,22.4 ccw(c73.251,24.449) 74.7,23 75.893,24.193 ccw(c74.186,25.9) 76.6,25.9 76.6,29.91 ccw(c74.21,29.91) 75.9,31.6 68.544,38.956 cw(c70.34,40.752) 67.8,40.752 67.8,41.5 cw(c69.323,41.5) 68.246,42.577 B4.1@68.714,43.045 B4.2@72.532,46.863
  Bottom Layer w0.3: v1(15.2,33.3) 14.866,32.966 ccw(c16.231,31.6) 14.3,31.6 14.3,31.495 ccw(c14.995,31.495) 14.492,31.015 ccw(c14.995,31.495) 14.504,31.004 15.65,29.857 cw(c13.851,28.051) 16.4,28.051 16.4,24.549 ccw(c18.449,24.549) 17,23.1 17.817,22.283 ccw(c18.5,22.966) v1(18.5,22)
BUT4: B5.1 B5.2 U1.4 | length 84
  Top Layer w0.15: U1.4@14.243,31.525 cw(c14.287,31.525) 14.256,31.556 14.9,32.2 cw(c15.383,31.717) 15.383,32.4 v1(15.5,32.4)
  Top Layer w0.3: v1(17.6,23.9) ccw(c18.083,24.383) 18.083,23.7 19.5,23.7 67.517,23.7 ccw(c67.517,24.383) 68,23.9 ccw(c67.276,24.624) 68.3,24.624 68.3,27.076 ccw(c67.276,27.076) 68,27.8 67.244,28.556 cw(c69.04,30.352) 66.5,30.352 66.5,37.9 ccw(c64.44,37.9) 65.897,39.357 B5.2@65.461,39.792 B5.1@61.643,35.974
  Bottom Layer w0.3: v1(15.5,32.4) 15.278,32.178 ccw(c15.961,31.495) 14.995,31.495 ccw(c15.661,31.495) 15.19,31.024 15.357,30.857 16.003,30.211 cw(c13.851,28.051) 16.176,30.024 cw(c14.36,28.248) 16.9,28.248 16.9,25.107 ccw(c18.124,25.107) 17.259,24.241 v1(17.6,23.9)
GND: B1.3 B1.4 B2.3 B2.4 B3.3 B3.4 B4.3 B4.4 B5.3 B5.4 C1.1 C2.1 C3.1 C4.1 C5.2 C6.2 C7.2 C8.2 C9.1 C11.1 C12.1 C13.1 C14.1 C15.1 C16.1 C18.1 C19.1 C20.1 CN1.4 J1.4 J2.4 J3.3 J5.3 J6.1 LD1.2 LD2.2 LD3.2 LD4.2 LD5.2 R1.1 R12.1 U1.12 U1.18 U1.31 U1.47 U1.63 U2.0 U2.2 U3.2 U3.7 U3.9 U3.11 U3.15 | length 1.5
  Top Layer w0.15: U1.47@21.668,40.364 22.227,40.923 ; 22.227,40.923 ccw(c22.049,41.1) 22.3,41.1 cw(c22.541,41.1) 22.371,41.271 v1(22.6,41.5)
  other v1: 2.5,15 5,15 7.5,15 10,15 27.5,15 37.5,15 42.5,15 47.5,15 50,15 55,15 57.5,15 62.5,15 65,15 70,15 75,15 77.5,15 82.5,15 2.5,17.5 5,17.5 7.5,17.5 20,17.5 22.5,17.5 25,17.5 60,17.5 62.5,17.5 67.5,17.5 72.5,17.5 75,17.5 80,17.5 82.5,17.5 2.5,20 17.5,20 20,20 22.5,20 70,20 72.5,20 77.5,20 80,20 82.5,20 77.5,22.5 80,22.5 82.5,22.5 7.5,24 2.7,24.7 7.5,25 72.5,25 2.7,25.6 7.5,26 2.7,26.5 42.5,27.5 45,27.5 47.5,27.5 50,27.5 52.5,27.5 55,27.5 20,28.5 19.5,29 19,29.5 18.5,30 40,30 42.5,30 45,30 47.5,30 50,30 52.5,30 55,30 57.5,30 80,30 82.5,30 18,30.5 4.4,30.8 5.3,30.8 17.5,31 4.4,31.7 5.3,31.7 23.7,32 37.5,32.5 40,32.5 42.5,32.5 45,32.5 47.5,32.5 50,32.5 52.5,32.5 55,32.5 57.5,32.5 60,32.5 67.5,32.5 70,32.5 80,32.5 82.5,32.5 5.3,32.6 24.5,32.8 23.5,33 7.5,33.1 37.5,35 40,35 42.5,35 45,35 47.5,35 50,35 52.5,35 55,35 57.5,35 60,35 67.5,35 82.5,35 9.4,35.7 45,37.5 47.5,37.5 50,37.5 52.5,37.5 55,37.5 57.5,37.5 60,37.5 72.5,37.5 75,37.5 8.8,38.8 9.5,39.5 29,39.5 29.8,40 45,40 47.5,40 50,40 52.5,40 55,40 57.5,40 60,40 75,40 77.5,40 82.5,40 10.2,40.2 20.8,42.1 77.5,42.5 80,42.5 24.8,43.7 62.5,45 62.5,47.5 65,47.5 65,50 65,52.5
LED1: R2.1 U1.14 | length 18.3
  Top Layer w0.16: 16.8,26.9 cw(c17.068,26.9) 16.878,27.089 U1.14@17.779,27.99
  Top Layer w0.3: 16.8,26.9 ccw(c17.041,26.659) 16.7,26.659 16.7,26.266 ccw(c18.066,26.266) 17.1,25.3 17.456,24.944 ccw(c19.252,26.74) 19.252,24.2 28.993,24.2 ccw(c28.993,25.907) 30.2,24.7 cw(c31.407,23.493) 31.407,25.2 R2.1@31.55,25.2
LED2: R3.1 U1.15 | length 18.2
  Top Layer w0.16: 17.4,26.9 18.132,27.632 U1.15@18.132,27.636
  Top Layer w0.3: 17.4,26.9 ccw(c17.641,26.659) 17.3,26.659 17.3,26.283 ccw(c17.983,26.283) 17.5,25.8 17.856,25.444 ccw(c19.652,27.24) 19.652,24.7 28.776,24.7 ccw(c28.776,25.724) 29.5,25 ccw(c28.776,25.724) 29.8,25.724 29.8,25.8 cw(c31.49,25.8) 30.295,26.995 30.4,27.1 cw(c31.124,26.376) 31.124,27.4 R3.1@31.55,27.4
LED3: R4.1 U1.16 | length 18.6
  Top Layer w0.16: 17.8,26.5 cw(c18.033,26.5) 17.868,26.665 U1.16@18.486,27.282
  Top Layer w0.3: 17.8,26.5 ccw(c18.041,26.5) 17.871,26.329 18.193,26.007 ccw(c19.9,27.714) 19.9,25.3 28.517,25.3 ccw(c28.517,25.983) 29,25.5 ccw(c28.276,26.224) 29.3,26.224 29.3,28.4 cw(c30.266,28.4) 29.583,29.083 29.7,29.2 cw(c30.424,28.476) 30.424,29.5 R4.1@31.55,29.5
LED4: R5.1 U1.17 | length 15.4
  Top Layer w0.16: U1.17@21.314,27.282 22.097,26.5
  Top Layer w0.3: 22.097,26.5 22.582,26.014 ccw(c23.1,26.532) 23.1,25.8 28.076,25.8 ccw(c28.076,26.424) 28.517,25.983 ccw(c27.834,26.666) 28.8,26.666 28.8,29.248 cw(c31.34,29.248) 29.544,31.044 29.9,31.4 cw(c30.624,30.676) 30.624,31.7 R5.1@31.55,31.7
NetB1_1: B1.1 B1.2 C1.2 J5.5 U1.7 | length 40.2
  Top Layer w0.15: U1.7@15.304,30.464 16.184,31.345 cw(c16.8,30.729) v1(16.8,31.6)
  Top Layer w0.3: C1.2@23,50.75 23,51.117 cw(c23.683,51.117) 23.2,51.6 cw(c23.562,51.238) 23.562,51.75 B1.1@24.7,51.75 ; v1(26.4,48.8) 25.444,49.756 cw(c27.24,51.552) 24.7,51.552 B1.1@24.7,51.75 ; B1.2@30.1,51.75 B1.1@24.7,51.75
  Bottom Layer w0.3: v1(16.8,31.6) 19.756,34.556 ccw(c17.96,36.352) 20.5,36.352 20.5,37.8 ccw(c19.776,37.8) 20.288,38.312 18.254,40.346 ; 18.253,40.347 cw(c19.107,41.2) 17.9,41.2 cw(c19.59,41.2) 18.395,42.395 23.256,47.256 cw(c25.052,45.46) 25.052,48 25.3,48 ccw(c25.3,48.724) 25.812,48.212 v1(26.4,48.8) 27.261,49.661 ccw(c25.622,51.3) J5.5@27.94,51.3
NetC2_2: C2.2 U1.5 X1.3 | length 7.1
  Top Layer w0.15: 13.4,30.7 13.9,30.7 ccw(c13.9,31.244) 14.284,30.859 U1.5@14.597,31.172
  Top Layer w0.3: C2.2@9.072,32.572 10.159,31.485 cw(c9.859,31.185) X1.3@10.283,31.185 10.955,31.857 cw(c11.3,31.512) 11.3,32 cw(c11.3,31.034) 11.983,31.717 12.717,30.983 ccw(c13.4,31.666) 13.4,30.7
NetC3_2: C3.2 U1.6 X1.1 | length 8
  Top Layer w0.15: 13.7,30.2 14.159,30.2 ccw(c14.159,30.541) 14.4,30.3 14.895,30.795 cw(c14.95,30.74) U1.6@14.95,30.818
  Top Layer w0.3: X1.1@9.717,28.215 10.214,27.719 ccw(c10.5,28.005) 10.5,27.6 ccw(c10.5,28.324) 11.012,27.812 12.1,28.9 ; C3.2@13.072,28.072 12.345,28.799 ccw(c12.1,28.554) 12.1,28.9 ; 13.7,30.2 ccw(c13.7,29.476) 13.188,29.988 12.1,28.9